# Allegro board demob2.brd
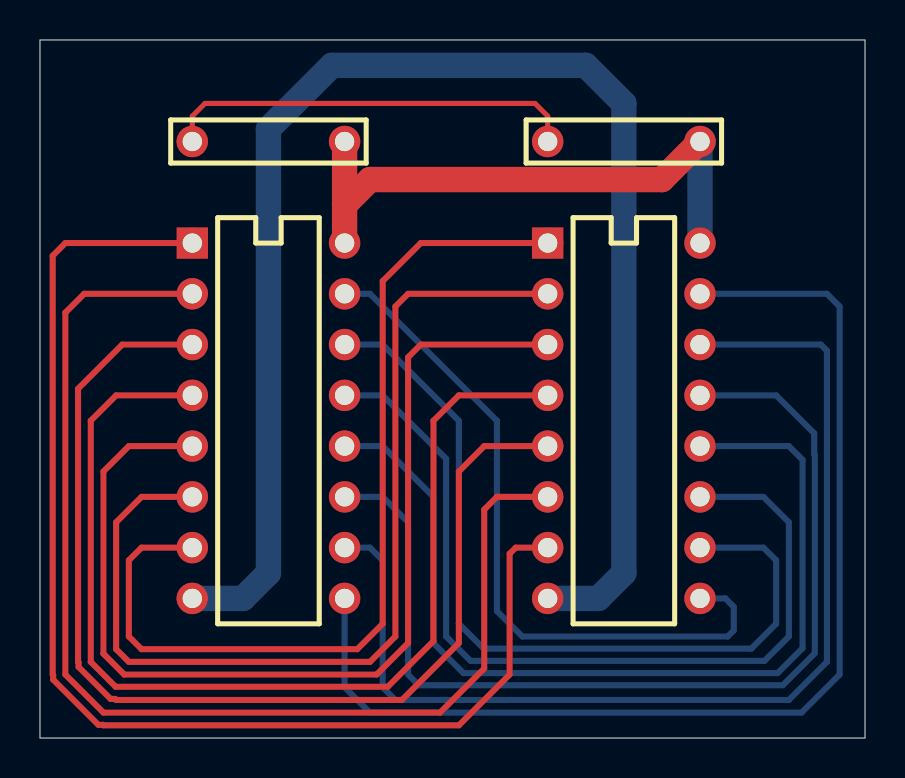
[diagram p0: board, top side]
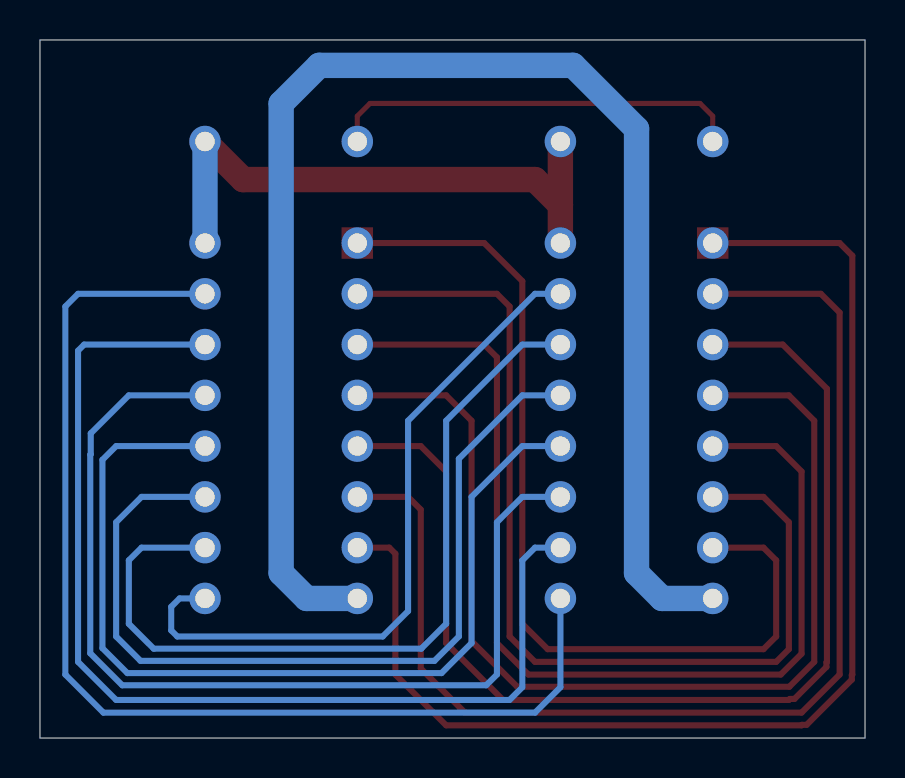
[diagram p1: board, bottom side, seen from below]

Outline 41.27 x 34.93 mm; copper layers: TOP, GND, POWER, INNER1, INNER2, BOTTOM. Coordinates in mm from the lower left corner of the outline.
Outline path: 0,34.93 41.27,34.93 41.27,0 0,0 0,34.93

## Design rules (mm)
nets with their own width: min track width 0.254; nets GND_SIGNAL
nets with their own width: min track width 0.305; nets N01899 N01900 N01901 N01902 N01903 N01904 N01905 N01906 N01907 N01908 N01909 N01910 N01911 N01912
nets with their own width: min track width 1.27; nets GND VCC

## Placement (name value [footprint] x y rotation side)
C1  CAP NP  [AC300100A]  15.24 29.85 180 top
C2  CAP NP  [AC300100A]  33.02 29.85 180 top
U1  74LS158  [DIP16]  7.62 24.77 270 top
U2  74LS158  [DIP16]  25.4 24.77 270 top

## Library data of the parts
C1 C2 = CAP_NP
U1 U2 = 74LS158

## Footprints (pads in the part's own frame, mm; a bottom-side part is the same pattern mirrored in y, then rotated)
AC300100A
  round 1.575 hole 0.965: 1(0,0) 2(7.62,0)
DIP16
  rect 1.575x1.575 hole 0.965: 1(0,0)
  round 1.575 hole 0.965: 2(2.54,0) 3(5.08,0) 4(7.62,0) 5(10.16,0) 6(12.7,0) 7(15.24,0) 8(17.78,0) 9(17.78,7.62) 10(15.24,7.62) 11(12.7,7.62) 12(10.16,7.62) 13(7.62,7.62) 14(5.08,7.62) 15(2.54,7.62) 16(0,7.62)

## Nets
GND: U1.8(TP-8) U2.8(TP-8)
GND_SIGNAL: C1.2(TP-2) C2.2(TP-2)
VCC: C1.1(TP-1) C2.1(TP-1) U1.16(TP-16) U2.16(TP-16)
N01899: U1.2(TP-2) U2.6(TP-6)
N01900: U1.3(TP-3) U2.5(TP-5)
N01901: U1.4(TP-4) U2.4(TP-4)
N01902: U1.5(TP-5) U2.3(TP-3)
N01903: U1.6(TP-6) U2.2(TP-2)
N01904: U1.7(TP-7) U2.1(TP-1)
N01905: U1.9(TP-9) U2.15(TP-15)
N01906: U1.10(TP-10) U2.14(TP-14)
N01907: U1.11(TP-11) U2.13(TP-13)
N01908: U1.12(TP-12) U2.12(TP-12)
N01909: U1.14(TP-14) U2.10(TP-10)
N01910: U1.1(TP-1) U2.7(TP-7)
N01911: U1.13(TP-13) U2.11(TP-11)
N01912: U1.15(TP-15) U2.9(TP-9)

## Routing (per net, layer and track width the routed paths; a pad name or vN(x,y) marks a point on that pad's centre or on a via; arc(x,y) is an arc through that point)
GND: length 74.3
  BOTTOM w1.27: U2.8 27.94,6.99 29.21,8.25 29.21,31.75 27.3,33.66 14.61,33.66 11.43,30.48 11.43,8.25 10.16,6.99 U1.8
GND_SIGNAL: length 20.8
  TOP w0.254: C2.2 25.4,31.11 24.77,31.75 8.26,31.75 7.62,31.11 C1.2
VCC: length 29.3
  TOP w1.27: U1.16 15.24,26.67 ; 15.24,26.67 C1.1 ; 15.24,26.67 16.51,27.94 31.11,27.94 C2.1
  BOTTOM w1.27: C2.1 U2.16
N01899: length 58.9
  TOP w0.305: U2.6 22.86,12.07 22.23,11.43 22.23,3.48 20.02,1.27 3.17,1.27 1.27,3.17 1.27,21.29 2.21,22.22 U1.2
N01900: length 55
  TOP w0.305: U2.5 22.23,14.61 20.95,13.34 20.95,4.75 18.11,1.91 3.81,1.91 3.76,1.96 3.53,1.96 1.93,3.56 1.93,3.78 1.91,3.81 1.91,17.48 4.11,19.68 U1.3
N01901: length 53.5
  TOP w0.305: U1.4 3.81,17.14 2.54,15.88 2.54,3.81 3.78,2.57 17.4,2.57 19.68,4.85 19.68,15.88 20.95,17.14 U2.4
N01902: length 52
  TOP w0.305: U1.5 4.45,14.61 3.17,13.34 3.17,4.22 4.22,3.17 16.84,3.17 18.41,4.75 18.41,19.05 19.05,19.68 U2.3
N01903: length 49.8
  TOP w0.305: U1.6 5.08,12.07 3.81,10.8 3.81,4.45 4.45,3.81 16.51,3.81 17.78,5.08 17.78,21.59 18.41,22.22 U2.2
N01904: length 46.9
  TOP w0.305: U2.1 19.05,24.77 17.14,22.86 17.14,5.72 15.88,4.45 5.08,4.45 4.45,5.08 4.45,8.89 5.08,9.52 U1.7
N01905: length 56.2
  BOTTOM w0.305: U2.15 39.37,22.22 40.01,21.59 40.01,3.17 38.1,1.27 16.51,1.27 15.24,2.54 U1.9
N01906: length 53.8
  BOTTOM w0.305: U1.10 16.51,9.52 17.14,8.89 17.14,2.54 17.78,1.91 37.47,1.91 39.37,3.81 39.37,19.38 39.07,19.68 U2.14
N01907: length 50.1
  BOTTOM w0.305: U2.13 36.83,17.14 38.73,15.24 38.73,14.2 38.76,14.17 38.76,4.24 37.16,2.64 18.95,2.64 18.41,3.17 18.41,10.8 17.14,12.07 U1.11
N01908: length 47.3
  BOTTOM w0.305: U2.12 37.47,14.61 38.15,13.92 38.15,4.5 36.9,3.25 21.19,3.25 19.68,4.75 19.68,12.07 17.14,14.61 U1.12
N01909: length 41.6
  BOTTOM w0.305: U1.14 17.14,19.68 20.95,15.88 20.95,5.72 22.2,4.47 35.59,4.47 36.83,5.72 36.83,8.89 36.2,9.52 U2.10
N01910: length 61.4
  TOP w0.305: U1.1 1.27,24.77 0.64,24.13 0.64,3.17 0.66,3.15 0.66,2.92 2.92,0.66 3.15,0.66 3.17,0.64 20.95,0.64 23.5,3.17 23.5,9.22 23.8,9.52 U2.7
N01911: length 44.1
  BOTTOM w0.305: U1.13 17.14,17.14 20.32,13.97 20.32,5.08 21.54,3.86 36.25,3.86 37.47,5.08 37.47,10.8 36.2,12.07 U2.11
N01912: length 35.3
  BOTTOM w0.305: U1.15 16.51,22.22 22.86,15.88 22.86,6.35 24.13,5.08 34.4,5.08 34.71,5.38 34.71,6.57 34.29,6.99 U2.9
